# Altium PCB independent-5V.PcbDoc
Units mil, origin at the board's own origin, x right, y up, seen from the top; angles counter-clockwise.
Board outline 6000 x 4000 mil, 2 copper layers (Top Layer, Bottom Layer); 48 components, 12 nets, 118 pads, 32 vias.
Unrouted connection lines stored in the file: 49.
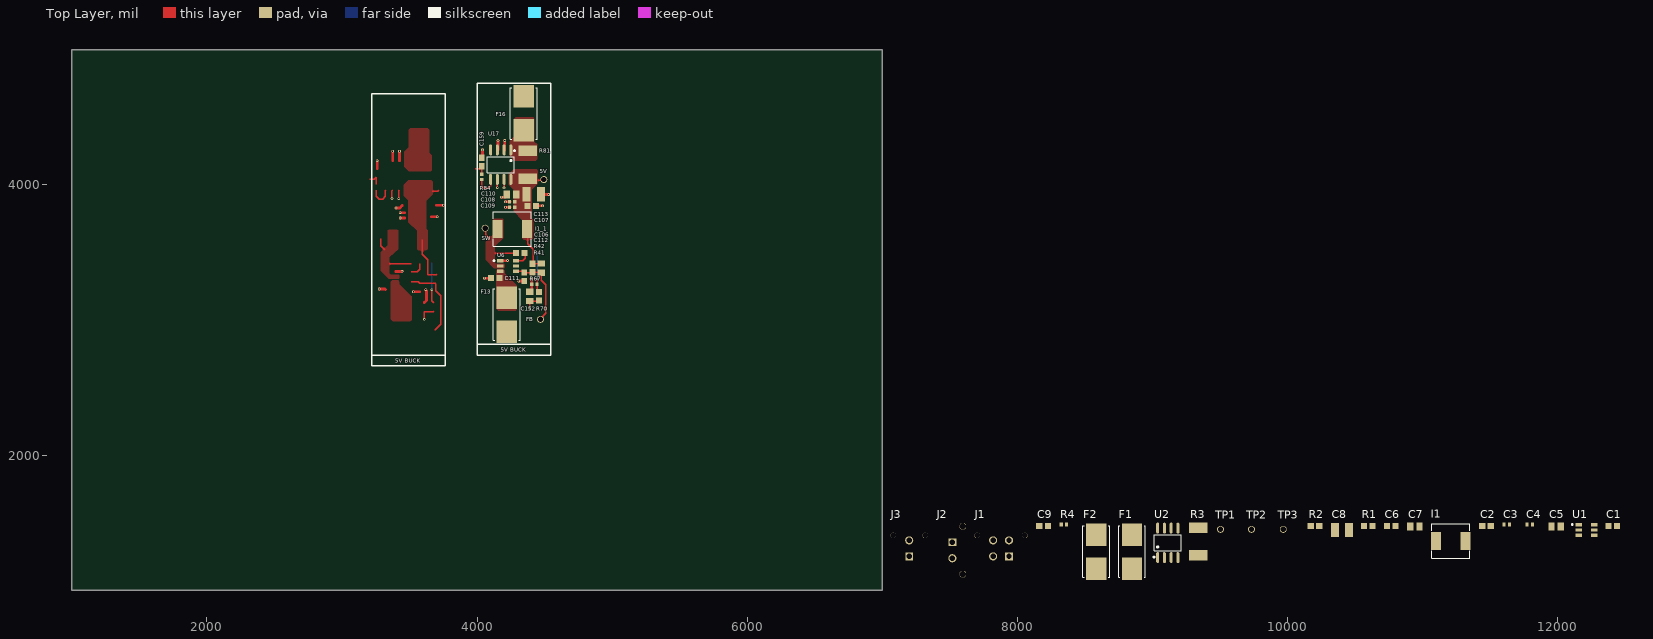
[diagram p0: Top Layer view]
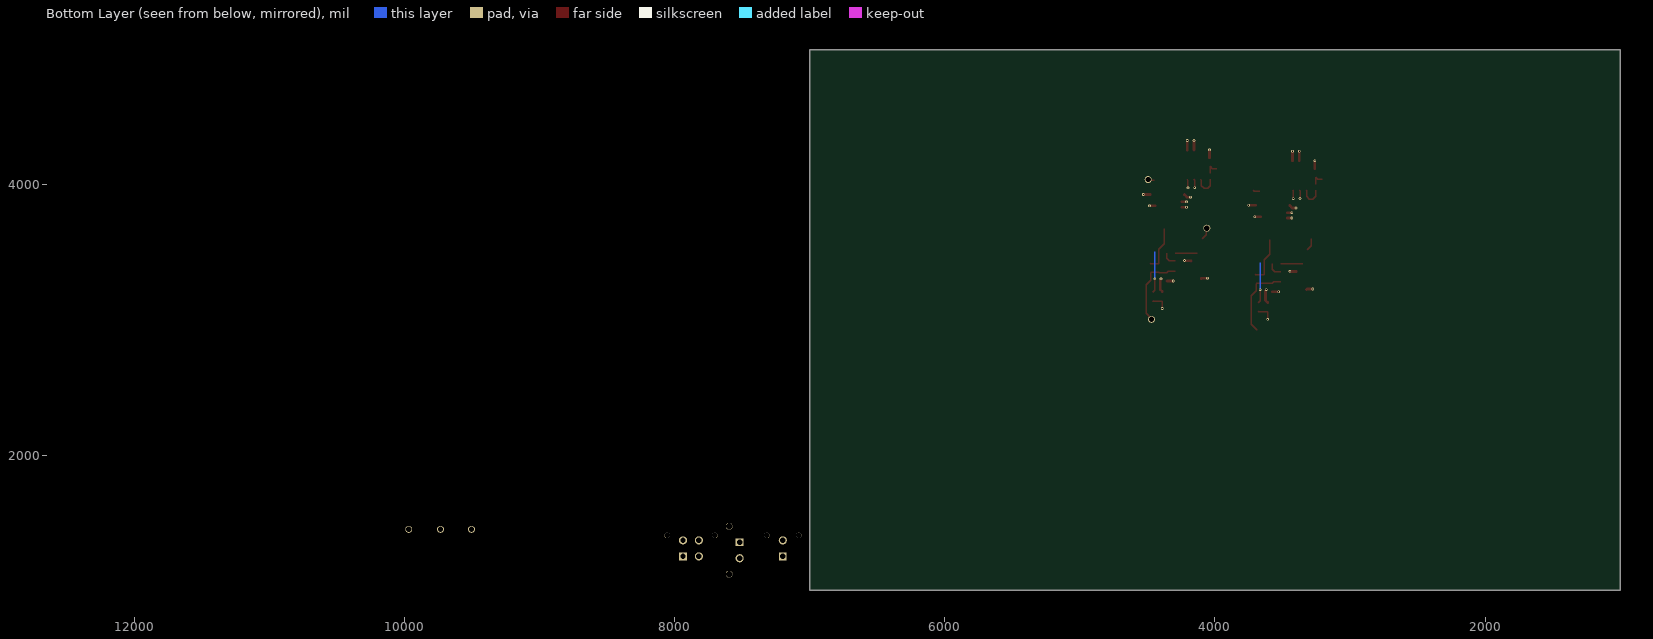
[diagram p1: Bottom Layer view, seen from below]

## Layer stack, top to bottom
Top Solder: solder mask 0.4, Solder Resist, Dk 3.5
Top Layer: signal copper 1.4
Dielectric 1: dielectric 12.6, FR-4, Dk 4.8
Bottom Layer: signal copper 1.4
Bottom Solder: solder mask 0.4, Solder Resist, Dk 3.5

## Board outline
1000,1000 7000,1000 7000,5000 1000,5000

## Design rules (kind name [scope] priority, off if disabled: settings)
Clearance [All] p1: gap=10 ignorepadtopadclearanceinfootprint=FALSE
PolygonConnect [All] p1: connectstyle=Relief reliefconductorwidth=10 reliefentries=4 polygonreliefangle="90 Angle" airgapwidth=10
RoutingVias [All] p1: holewidth=28 width=50 viastyle="Through Hole" minholewidth=28 minwidth=50 maxholewidth=28 maxwidth=50
SolderMaskExpansion [All] p1: expansion=4 istentingtop=FALSE
SupplyNets "Schematic Supply Nets_6" [InNet('GND')] p1: voltage=0.000
SupplyNets "Schematic Supply Nets_5" [InNet('3V3_LDO')] p2: voltage=0.000
SupplyNets "Schematic Supply Nets_4" [InNet('5V_BUCK')] p3: voltage=0.000
SupplyNets "Schematic Supply Nets_3" [InNet('5V_BUCK_F')] p4: voltage=0.000
SupplyNets "Schematic Supply Nets_2" [InNet('12V_BUCKS')] p5: voltage=0.000
SupplyNets "Schematic Supply Nets_1" [InNet('5V_BUCK_C')] p6: voltage=0.000
SupplyNets "Schematic Supply Nets" [InNet('12V_BUCKS_FUSED_0')] p7: voltage=0.000
Width [All] p1: maxlimit=10 minlimit=10 preferedwidth=10
30 further rules are at their usual default settings.

## Classes and differential pairs
component class independent_5V: C1 C2 C3 C4 C5 C6 C8 C9 F1 F2 J2 J3 R1 R2 R3 TP1 TP2 U1 U2

## Components (designator, comment, footprint, x,y, rotation, side; value= is the part's Value field where it differs from the comment)
5V "5003" TEST-POINT-0001 4495,4040 r90 top (schematic designator TP21)
C1 "CC0603KRX7R0BB104" CAP-0603 12410,1475 r0 top
C2 "CC0603KRX5R6BB106" CAP-0603 11475,1475 r0 top
C3 "CC0402KRX7R7BB104" CAP-0402 11625,1485 r0 top
C4 "CC0402KRX7R7BB104" CAP-0402 11795,1485 r0 top
C5 "CC0805JRNPO9BN471" CAP-0805 11990,1470 r0 top
C6 "CC0603KRX5R8BB475" CAP-0603 10770,1475 r0 top
C7 "CC0805JRNPO9BN820" CAP-0805 10945,1470 r0 top
C8 "GRM32ER61C476KE15L" CAP-1210 10405,1445 r0 top
C9 "CC0603KRX7R0BB104" CAP-0603 8195,1475 r0 top
C106 "CC0603KRX7R0BB104" CAP-0603 4320,3495 r180 top
C107 "CC0603KRX5R6BB106" CAP-0603 4405,3845 r180 top
C108 "CC0402KRX7R7BB104" CAP-0402 4260,3875 r0 top
C109 "CC0402KRX7R7BB104" CAP-0402 4260,3835 r0 top
C110 "CC0805JRNPO9BN471" CAP-0805 4255,3930 r0 top
C111 "CC0603KRX5R8BB475" CAP-0603 4135.71,3310 r0 top
C112 "CC0805JRNPO9BN820" CAP-0805 4475,3385 r270 top
C113 "GRM32ER61C476KE15L" CAP-1210 4420,3930 r0 top
C152 "CC0805KRX7R9BB104" CAP-0805 4390,3175 r90 top
C159 "CC0603KRX7R0BB104" CAP-0603 4035,4170 r90 top
F1 "01550900M" FUSE-0001 8850,1285 r90 top
F2 "01550900M" FUSE-0001 8585,1285 r90 top
F13 "01550900M" FUSE-0001 4220.71,3040 r90 top
F16 "01550900M" FUSE-0001 4345,4530 r90 top
FB "5003" TEST-POINT-0001 4470,3005 r90 top (schematic designator TP23)
I1 "SRP6540-5R6M" IND_SRP6540-5R6M 11210,1365 r0 top
I1_1 "SRP6540-5R6M" IND_SRP6540-5R6M 4260,3675 r0 top (schematic designator I1)
J1 "Molex 43045-0412" CONN-4POS-0002 7880,1250 r0 top
J2 "0436500215" CONN-2POS-0002 7520,1295 r90 top
J3 "0430450212" CONN-2POS-0001 7200,1250 r0 top
R1 "RC0603FR-07100KL" RES-0603 10600,1475 r0 top
R2 "RC0603FR-0713K7L" RES-0603 10205,1475 r0 top
R3 "CSNL2512FTL500" RES-2512 9345,1360 r90 top
R4 "RC0402FR-0710KL" RES-0402 8345,1485 r0 top
R41 "RC0603FR-07100KL" RES-0603 4410,3385 r270 top
R42 "RC0603FR-0713K7L" RES-0603 4350,3320 r270 top
R67 "RC0603FR-0747RL" RES-0603 4460,3175 r90 top
R70 "TMP6431DECR" RES-0402 4425,3265 r0 top
R81 "CSNL2512FTL500" RES-2512 4370,4150 r270 top
R84 "RC0402FR-0710KL" RES-0402 4035,4060 r90 top
SW "5003" TEST-POINT-0001 4060,3680 r90 top (schematic designator TP22)
TP1 "5003" TEST-POINT-0001 9505,1450 r0 top
TP2 "5003" TEST-POINT-0001 9735,1450 r0 top
TP3 "5003" TEST-POINT-0001 9970,1450 r0 top
U1 "TPS54302DDCR" IC-SOT-23-6 12215,1445 r0 top
U2 "AD8418AWBRZ-RL" IC-CURR 9115,1350 r0 top
U6 "TPS54302DDCR" IC-SOT-23-6 4230,3400 r0 top
U17 "AD8418AWBRZ-RL" IC-CURR 4175.35,4150 r180 top

## Footprints (in the part's own frame and the unit in brackets; to place one, negate y for a bottom-side part, rotate by r counter-clockwise, add the part's x,y. Pads: shape width x height; smd on the part's side, far side on the other; paste and mask are expansions set on the pad)
CAP-0402 [mm]
  rect 0.6x0.7 smd: 1(-0.5,0) 2(0.5,0)
  body extent -0.5,-0.22 0.5,0.23, height 0.5
CAP-0603 [mm]
  rect 1.15x1.1 smd: 1(-0.8,0) 2(0.8,0)
  body extent -0.8,-0.45 0.8,0.45, height 0.8
CAP-0805 [mm]
  rect 1.16x1.47 smd: 1(-0.88,0) 2(0.88,0)
  body extent -1,-0.63 1,0.63, height 0.94
CAP-1210 [mm]
  rect 1.53x2.72 smd: 1(-1.341,0) 2(1.341,0)
  body extent -1.6,-1.25 1.6,1.25, height 2.7
CONN-2POS-0001 [mm]
  round 1.02 hole 1.02 unplated: 1(-3,3.94) 1(3,3.94)
  rect 1.482x1.482 / inner rect 1.524x1.524 / far side rect 1.482x1.482 hole 1.02: 1(0,0)
  round 1.53 / inner round 1.524 / far side round 1.53 hole 1.02: 2(0,3)
  body extent -3.57,-2.42 3.57,6.35, height 9.91
CONN-2POS-0002 [mil]
  round 50 hole 50 unplated: 1(-177.17,-77.17) 1(177.17,-77.17)
  rect 58.33x58.33 / inner rect 60x60 / far side rect 58.33x58.33 hole 40.16: 1(59.06,0)
  round 60.24 / inner round 60 / far side round 60.24 hole 40.16: 2(-59.06,0)
  body extent -190,-97 190,123, height 395
CONN-4POS-0002 [mm]
  round 1.02 hole 1.02 unplated: 1(-4.5,3.94) 1(4.5,3.94)
  rect 1.482x1.482 / inner rect 1.524x1.524 / far side rect 1.482x1.482 hole 1.02: 1(1.5,0)
  round 1.53 / inner round 1.524 / far side round 1.53 hole 1.02: 2(-1.5,0) 3(1.5,3) 4(-1.5,3)
  body extent -5.07,-2.45 5.08,6.32, height 10.03
FUSE-0001 [mil]
  rect 167x150 smd paste+0 mask+0: 1(-125.5,0) 2(125.5,0)
  silkscreen extent -192,-99 192,99, body extent -213,-103 213,103, height 10
IC-CURR [mm]
  oval 0.588x2.045 smd paste+0 mask+0.051: 1(-1.905,-2.772) 2(-0.635,-2.772) 3(0.635,-2.772) 4(1.905,-2.772) 5(1.905,2.772) 6(0.635,2.772) 7(-0.635,2.772) 8(-1.905,2.772)
  silkscreen extent -2.7,-2.78 2.53,1.52, body extent -2.5,-3.17 2.5,3.02, height 1.76
IC-SOT-23-6 [mm]
  rect 1.2x0.65 smd paste+0 mask+0.051: 1(-1.475,0.95) 2(-1.475,0) 3(-1.475,-0.95) 4(1.475,-0.95) 5(1.475,0) 6(1.475,0.95)
  silkscreen extent -2.79,0.89 -2.54,1.14, body extent -1.4,-1.45 1.4,1.45, height 0.97
IND_SRP6540-5R6M [mm]
  rect 1.85x3.4 smd: 1(-2.775,0) 2(2.775,0)
  silkscreen extent -3.6,-3.25 3.6,3.25, body extent -3.59,-3.25 3.59,3.25, height 4.05
RES-0402 [mm]
  rect 0.6x0.7 smd: 1(-0.5,0) 2(0.5,0)
  body extent -0.5,-0.25 0.5,0.25, height 0.3
RES-0603 [mm]
  rect 1.15x1.1 smd: 1(-0.8,0) 2(0.8,0)
  body extent -0.8,-0.4 0.8,0.4, height 0.43
RES-2512 [mil]
  rect 78x137 smd paste+0 mask+0: 1(-103,5) 2(103,5)
  body extent -126,-58 124,68, height 49
TEST-POINT-0001 [mm] "2024 miniature test point"
  round 1.3 hole 1: 1(0,0)
  body extent -1.27,-1.27 1.27,1.27, height 4.57

## Part data
5V FB SW TP1 TP2 TP3: library part TEST-POINT-0001, "Oranange PC Test Point, Miniature Phoisphor Bronze Silver Plating Through Hole Mounting Type"
C1 C9 C106 C159: library part CAP-100N-0001, "CAP CER 0.1UF 100V X7R 0603", Capacitance="100 nF", Voltage="100 V", ComponentLink1Description=Datasheet, ComponentLink1URL=https://www.yageo.com/upload/media/product/app/datasheet/mlcc/upy-np0x7r_mv_100-to-630v.pdf, Device Class=Ceramic, Size=0603
C2 C107: library part CAP-10U-0001, "CAP CER 10UF 10V X5R 0603", Capacitance="10 uF", Voltage=10V, ComponentLink1Description=Datasheet, ComponentLink1URL=https://www.yageo.com/upload/media/product/app/datasheet/mlcc/upy-gphc_x5r_4v-to-50v.pdf, Device Class=Ceramic, Size=0603
C3 C4 C108 C109: library part CAP-0.1U-0001, "CAP CER 0.1UF 16V X7R 0402", Capacitance="100 nF", Voltage Rating="16 V", ComponentLink2Description=Datasheet, ComponentLink2URL=https://www.yageo.com/upload/media/product/productsearch/datasheet/mlcc/UPY-GPHC_X7R_6.3V-to-250V_24.pdf, Device Class=Ceramic, Size=0402
C5 C110: library part CAP-470P-0001, "CAP CER 470PF 50V C0G/NPO 0805", Capacitance="470 pF", Voltage=50V, ComponentLink1Description=Datasheet, ComponentLink1URL=https://www.yageo.com/upload/media/product/productsearch/datasheet/mlcc/UPY-GP_NP0_16V-to-50V_18.pdf, Device Class=Ceramic, Size=0805
C6 C111: library part CAP-4.7U-0001, "CAP CER 4.7UF 25V X5R 0603", Capacitance="4.7 uF", Voltage=25V, Device Class=Ceramic, Size=0603
C7 C112: library part CAP-82P-0001, "82 pF ±5% 50V Ceramic Capacitor C0G, NP0 0805 (2012 Metric)", Capacitance=82pF, Voltage=50V
C8 C113: library part CAP-47U-0002, "CAP CER 47UF 16V X5R 1210", Capacitance="47 uF", Voltage=16V, ComponentLink1Description=Datasheet, ComponentLink1URL=https://search.murata.co.jp/Ceramy/image/img/A01X/G101/ENG/GRM32ER61C476KE15-01.pdf, Device Class=Ceramic, Size=1210
C152: library part CAP-0.1U-0002, "CAP CER 0.1UF 50V X7R 0805", Capacitance="100 nF", Voltage Rating="50 V", ComponentLink2Description=Datasheet, ComponentLink2URL=https://www.yageo.com/upload/media/product/productsearch/datasheet/mlcc/UPY-GPHC_X7R_6.3V-to-250V_24.pdf, Device Class=Ceramic, Size=0805
F1 F2 F13 F16: library part FUSE-0001, "FUSE BLOK CARTRIDGE 125V 10A SMD", Fuse Current=8A, Voltage Rating=125V, ComponentLink2Description=Datasheet, ComponentLink2URL=https://www.littelfuse.com/~/media/electronics/datasheets/fuses/littelfuse_fuse_154_154t_154l_154tl_datasheet.pdf.pdf
I1 I1_1: library part IND-5.6U-0002, "FIXED IND 5.6UH 5.5A 38 MOHM SMD", Inductance=5.6uH, Saturation Current=5.5A
J1: library part CONN-4POS-0002, "CONN HEADER VERT 4POS 3MM", ComponentLink1Description=Datasheet, ComponentLink1URL=https://www.molex.com/content/dam/molex/molex-dot-com/products/automated/en-us/salesdrawingpdf/430/43045/430450412_sd.pdf?inline
J2: library part CONN-2POS-0002, "CONN HEADER VERT 2POS 3MM", ComponentLink1Description=Datasheet, ComponentLink1URL=https://www.molex.com/content/dam/molex/molex-dot-com/products/automated/en-us/salesdrawingpdf/436/43650/436500215_sd.pdf?inline
J3: library part CONN-2POS-0001, "CONN HEADER VERT 2POS", ComponentLink1Description=Datasheet, ComponentLink1URL=https://tools.molex.com/pdm_docs/ps/PS-43045.pdf
R1 R41: library part RES-100k-0001, "RES SMD 100K OHM 1% 1/10W 0603", Power=100mW, Resistance=100k, Tolerance=1%, ComponentLink1Description=Datasheet, ComponentLink1URL=https://www.yageo.com/upload/media/product/products/datasheet/rchip/PYu-RC_Group_51_RoHS_L_12.pdf, Size=0603
R2 R42: library part RES-13.7K-0001, "RES 13.7K OHM 1% 1/10W 0603", Power=1/10W, Resistance=13.7k
R3 R81: library part RES-0.5m-0001, "2512 Chip Resistor - Surface Mount ROHS", Power=3W, Resistance=0.5m, Tolerance=1%, ComponentLink1Description=Datasheet, ComponentLink1URL=https://www.yageo.com/upload/media/product/products/datasheet/rchip/PYu-RC_Group_51_RoHS_L_12.pdf, Size=0402
R4 R84: library part RES-10k-0001, "RES 10K OHM 1% 1/16W 0402", Power=1/16W, Resistance=10k, Tolerance=1%, ComponentLink1Description=Datasheet, ComponentLink1URL=https://www.yageo.com/upload/media/product/products/datasheet/rchip/PYu-RC_Group_51_RoHS_L_12.pdf, Size=0402
R67: library part RES-47-0001, "RES 47 OHM 1% 1/10W 0603", Power=1/10W, Resistance=47R, Tolerance=1%, ComponentLink1Description=Datasheet, ComponentLink1URL=https://www.yageo.com/upload/media/product/products/datasheet/rchip/PYu-RC_Group_51_RoHS_L_12.pdf, Size=0603
R70: library part RES-47k-0001, "PTC Thermistor 47 kOhms 0402 (1006 Metric)", Resistance="47k +- 1%"
U1 U6: library part IC-BUCK-0004, "IC REG BUCK ADJ 3A SOT23"
U2 U17: library part IC-CURR-0001, "Current Sense Amplifier 1 Circuit 8-MSOP"

## Via types
v1: diameter 20, hole 8, Top Layer to Bottom Layer, 32 vias

## Nets (pads, with @x,y where several pads share a name; then routed paths per layer and width w, separated by ;. In a path a pad name is that pad's centre, name@x,y a point inside that pad or via, vN(x,y) a via of type N, cw(c..) or ccw(c..) an arc to the next point about the centre after c; other vN are vias at no path point)
3V3_LDO: U2.6 U2.7
5V_BUCK: C2.2 C3.2 C4.2 C5.2 C7.1 C8.1 I1.2 R1.1 R3.2 TP1.1 U2.8
5V_BUCK_C: F1.1 R3.1 U2.1
5V_BUCK_F: F1.2 J1.3 J1.4 J2.1
12V_BUCKS: F2.1 J3.1
12V_BUCKS_FUSED_0: C6.2 F2.2 U1.3
BOOT_5: C1.1 U1.6
FB_5: C7.2 R1.2 R2.1 TP3.1 U1.4
GND: C2.1 C3.1 C4.1 C5.1 C6.1 C8.2 C9.2 J1.1 J1.2 J2.2 J3.2 R2.2 U1.1 U2.2 U2.3
NetC9_1: C9.1 R4.2
NetR4_1: R4.1 U2.5
SW_5: C1.2 I1.1 TP2.1 U1.2
pads on no net: 5V.1 C106.1 C106.2 C107.1 C107.2 C108.1 C108.2 C109.1 C109.2 C110.1 C110.2 C111.1 C111.2 C112.1 C112.2 C113.1 C113.2 C152.1 C152.2 C159.1 C159.2 F13.1 F13.2 F16.1 F16.2 FB.1 I1_1.1 I1_1.2 R41.1 R41.2 R42.1 R42.2 R67.1 R67.2 R70.1 R70.2 R81.1 R81.2 R84.1 R84.2 SW.1 U1.5 U2.4 U6.1 U6.2 U6.3 U6.4 U6.5 U6.6 U17.1 U17.2 U17.3 U17.4 U17.5 U17.6 U17.7 U17.8
copper on no net: | length 5669.3
  Top Layer w10: 3205.87,4040.87 3238.35,4040.87 3255,4057.52 3255,4058.5 3255,4004.96 ; 3255,3962.44 3255,3915 3275,3895 3300.35,3895 3320,3914.65 3320,3955.5 3325.35,3960.85 ; 3285.35,3600 3285.35,3550.35 3315.71,3520 ; 3350.35,3415 3513.86,3415 ; v1(3370,3900) 3370.18,3900.18 3370.18,3955.67 3375.35,3960.85 ; v1(3420,3898.94) 3420.18,3899.11 3420.18,3955.67 3425.15,3960.64 ; 3513.43,3282.6 3564.25,3282.6 3575.35,3271.5 3633.35,3271.5 3635.35,3273.5 3695,3273.5 ; 3513.43,3357.4 3557.76,3357.4 3576.85,3376.5 3576.85,3415 ; 3594.61,3595 3594.61,3485.75 3635.35,3445 3635.35,3336.5 3697.2,3336.5 3700.35,3339.65 ; v1(3610,3005) 3610,3060.35 3676.85,3060.35 3680,3063.5 ; v1(3665,3225) 3664.84,3224.84 3664.84,3185.16 3664.68,3185 3665,3184.68 3665,3141.5 3680,3126.5 ; 3670,3955 3710,3955 3715,3960 ; 3690,2925 3690,2929.1 3730,2969.1 3730,3180 3695,3215 3695,3270.35 ; 3985.87,4120.87 4018.35,4120.87 4035,4137.52 4035,4138.5 4035,4084.96 ; 4035,4042.44 4035,3995 4055,3975 4080.35,3975 4100,3994.65 4100,4035.5 4105.35,4040.85 ; 4065.35,3680 4065.35,3630.35 4095.71,3600 ; 4130.35,3495 4293.86,3495 ; v1(4150,3980) 4150.18,3980.18 4150.18,4035.67 4155.35,4040.85 ; v1(4200,3978.94) 4200.18,3979.11 4200.18,4035.67 4205.15,4040.64 ; 4293.43,3362.6 4344.25,3362.6 4355.35,3351.5 4413.35,3351.5 4415.35,3353.5 4475,3353.5 ; 4293.43,3437.4 4337.76,3437.4 4356.85,3456.5 4356.85,3495 ; 4374.61,3675 4374.61,3565.75 4415.35,3525 4415.35,3416.5 4477.2,3416.5 4480.35,3419.65 ; v1(4390,3085) 4390,3140.35 4456.85,3140.35 4460,3143.5 ; v1(4445,3305) 4444.84,3304.84 4444.84,3265.16 4444.69,3265 4445,3264.68 4445,3221.5 4460,3206.5 ; 4450,4035 4490,4035 4495,4040 ; 4470,3005 4470,3009.1 4510,3049.1 4510,3260 4475,3295 4475,3350.35
  Top Layer w20: 3260.35,4121.5 v1(3260.35,4180) ; v1(3275.71,3230) 3318.86,3230 3322.45,3226.41 ; 3375.35,4179.15 v1(3375.35,4250) ; 3397.28,3357.4 3398.58,3358.7 3444.06,3358.7 v1(3445.35,3360) ; v1(3400.35,3830) 3427.87,3830 3445.71,3847.83 3445.71,3850 ; 3425.35,4179.15 v1(3425.35,4250) ; v1(3430.35,3755) 3460.32,3755 3465.67,3755 ; v1(3430.35,3795) 3460.32,3795 3465.67,3795 ; v1(3528.26,3209.36) 3574.49,3209.36 3575.35,3208.5 ; 3610,3129.65 3625.32,3144.96 3625.32,3185 3625.32,3216.98 3620,3222.29 v1(3620,3225) ; 3661.85,3765 v1(3705.35,3765) ; 3698.15,3850 v1(3750.35,3850) ; 4040.35,4201.5 v1(4040.35,4260) ; v1(4055.71,3310) 4098.86,3310 4102.45,3306.41 ; 4155.35,4259.15 v1(4155.35,4330) ; 4177.28,3437.4 4178.58,3438.7 4224.06,3438.7 v1(4225.35,3440) ; v1(4180.35,3910) 4207.87,3910 4225.71,3927.83 4225.71,3930 ; 4205.35,4259.15 v1(4205.35,4330) ; v1(4210.35,3835) 4240.31,3835 4245.67,3835 ; v1(4210.35,3875) 4240.31,3875 4245.67,3875 ; v1(4308.26,3289.36) 4354.49,3289.36 4355.35,3288.5 ; 4390,3209.65 4405.31,3224.96 4405.31,3265 4405.31,3296.98 4400,3302.29 v1(4400,3305) ; 4441.85,3845 v1(4485.35,3845) ; 4478.15,3930 v1(4530.35,3930)
  Bottom Layer w10: v1(3665,3225) 3665,3425 ; v1(4445,3305) 4445,3505

## Polygon pours and split planes (outlines as drawn)
no net on Top Layer "NONET_L01_P007" (solid, pour order 7): 4140.71,3085 4155.71,3070 4285.71,3070 4295.71,3080 4295.71,3255 4285.71,3265 4205.71,3345 4205.71,3365 4195.71,3375 4150.71,3375 4140.71,3365
no net on Top Layer "NONET_L01_P006" (solid, pour order 6): 4435.35,4180 4445.35,4190 4445.35,4300 4425.35,4320 4425.35,4490 4415.35,4500 4285.35,4500 4275.35,4490 4275.35,4360 4240.35,4325 4240.35,4215 4275.35,4180
no net on Top Layer "NONET_L01_P005" (solid, pour order 5): 4460.35,4029.82 4450.71,4020.18 4450.71,4010 4405.35,3964.65 4405.35,3755 4415.35,3745 4415.35,3605 4405.35,3595 4390.35,3595 4380.35,3585 4370.35,3585 4360.35,3595 4345.35,3595 4335.35,3605 4335.35,3740 4270.35,3805 4270.35,3965 4235.35,4000 4235.35,4080 4270.35,4115 4440.35,4115 4450.35,4105 4450.35,4050 4460.35,4040
no net on Top Layer "NONET_L01_P004" (solid, pour order 4): 4080.54,3595.17 4080.53,3595.18 4080.53,3615.18 4100.53,3615.18 4100.54,3615.17 4120.35,3634.98 4120.35,3745 4125.35,3750 4190.35,3750 4195.35,3745 4195.35,3605 4130.35,3545 4130.35,3510 4140.35,3500 4140.35,3490 4130.35,3480 4130.35,3424.65 4140,3415 4200.35,3415 4205.35,3410 4205.35,3390 4200.35,3385 4125.35,3385 4065.35,3445 4065.35,3579.98
no net on Top Layer "NONET_L01_P003" (solid, pour order 3): 3360.71,3005 3375.71,2990 3505.71,2990 3515.71,3000 3515.71,3175 3505.71,3185 3425.71,3265 3425.71,3285 3415.71,3295 3370.71,3295 3360.71,3285
no net on Top Layer "NONET_L01_P002" (solid, pour order 2): 3655.35,4100 3665.35,4110 3665.35,4220 3645.35,4240 3645.35,4410 3635.35,4420 3505.35,4420 3495.35,4410 3495.35,4280 3460.35,4245 3460.35,4135 3495.35,4100
no net on Top Layer "NONET_L01_P001" (solid, pour order 1): 3680.35,3949.82 3670.71,3940.18 3670.71,3930 3625.35,3884.65 3625.35,3675 3635.35,3665 3635.35,3525 3625.35,3515 3610.35,3515 3600.35,3505 3590.35,3505 3580.35,3515 3565.35,3515 3555.35,3525 3555.35,3660 3490.35,3725 3490.35,3885 3455.35,3920 3455.35,4000 3490.35,4035 3660.35,4035 3670.35,4025 3670.35,3970 3680.35,3960
no net on Top Layer "NONET_L01_P000" (solid, pour order 0): 3300.54,3515.17 3300.53,3515.18 3300.53,3535.18 3320.53,3535.18 3320.54,3535.17 3340.35,3554.98 3340.35,3665 3345.35,3670 3410.35,3670 3415.35,3665 3415.35,3525 3350.35,3465 3350.35,3430 3360.35,3420 3360.35,3410 3350.35,3400 3350.35,3344.65 3360,3335 3420.35,3335 3425.35,3330 3425.35,3310 3420.35,3305 3345.35,3305 3285.35,3365 3285.35,3499.98

## Silkscreen, mask and mechanical layers (free items; w line width, h text height)
Top Overlay:
  lines w10: 3230.35,2740 3220,2740 ; 3270,2660 3290,2660 ; 4010.35,2820 4000,2820 ; 4050,2740 4070,2740 ; 3220,2740 3220,4675 3765.35,4675 3765.35,2740 ; 3220,2740 3765.35,2740 ; 3220,2740 3220,2660 3765.35,2660 3765.35,2740 ; 4000,2820 4000,4755 4545.35,4755 4545.35,2820 ; 4000,2820 4545.35,2820 ; 4000,2820 4000,2740 4545.35,2740 4545.35,2820
  text "5V BUCK" at 4175,2765 h30
  text "5V BUCK" at 3395,2685 h30